# EAGLE board rt_soldering_pen (EAGLE 6.6.0)
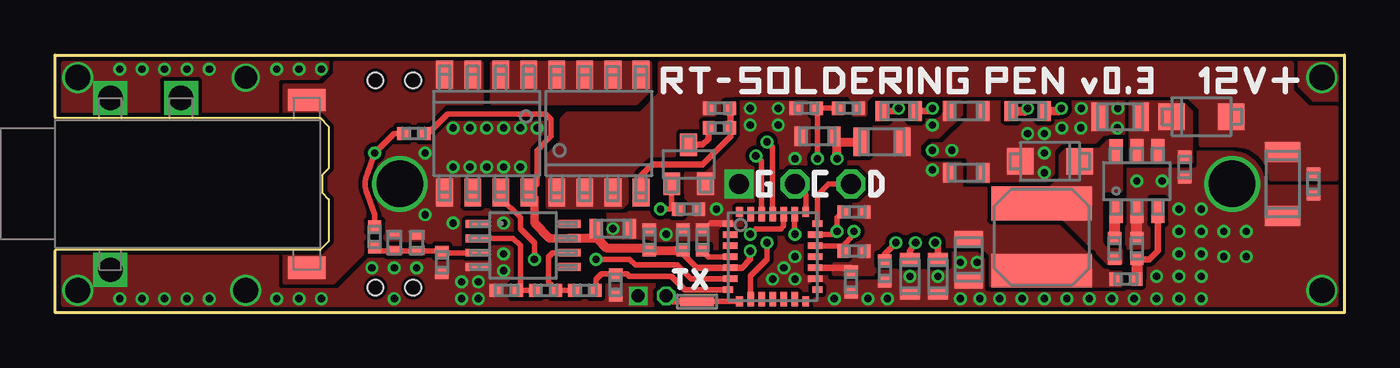
[diagram p0: board, top side]
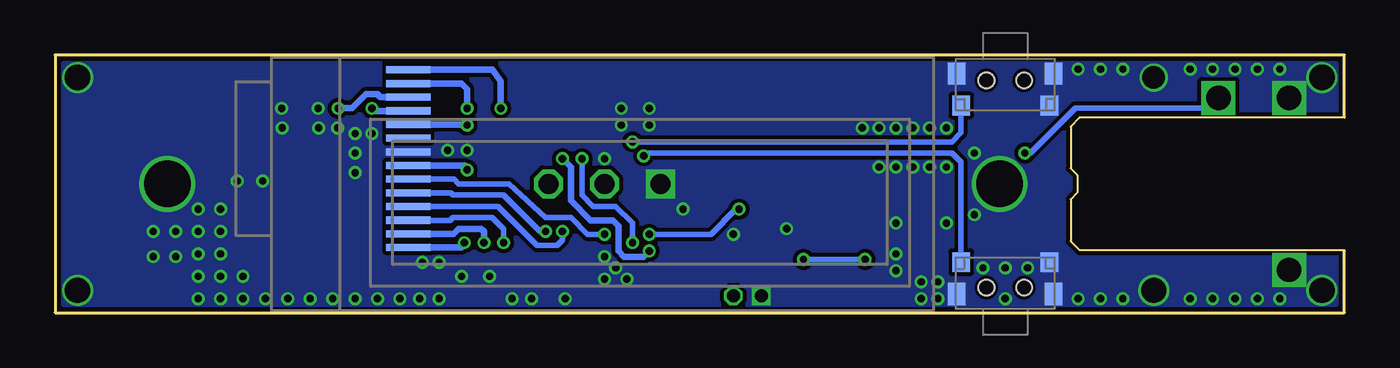
[diagram p1: board, bottom side, seen from below]

Size 58.42 x 11.68 mm. Coordinates in mm from the lower left corner, seen from the top.
Outline: 0,8.89 0,11.68 58.42,11.68 58.42,0 0,0 0,2.79
Copper layers (1*16): Top 0.0356mm / dielectric 1.5011mm / Bottom 0.0356mm
Design rules "oshpark-2layer *": minimum track width 6mil, minimum drill 13mil, track to track 6mil, track to pad 6mil, pad to pad 6mil, via to via 6mil, smd to smd 6mil, copper to edge 4mil, drill to drill 10mil, minimum pad ring 8mil, minimum via ring 5mil, stop-mask expansion 2mil, vias tented up to drill 13mil, thermal gap 10mil

## Footprints (pad centres in the part's own frame; a part is rotated, then mirrored left to right if it is on the bottom)
1206 = smd 0.9 x 1.6: 1 -1.45,0; 2 1.45,0
0402 = smd 0.5 x 0.6: 1 -0.5,0; 2 0.5,0
0805 = smd 0.7 x 1.3: 1 -0.95,0; 2 0.95,0
0603 = smd 0.6 x 0.9: 1 -0.75,0; 2 0.75,0
SOD123F = smd 1.2 x 1.2: A 1.35,0; C -1.35,0
DFN1006 = smd 0.4 x 0.7: A 0.35,0; C -0.35,0
SJ-3501-SMT = drill 1.1 pad 1.2 square: 1 2.5,-3.9; 3 5.7,3.9; 5 2.5,3.9 | smd 1.7 x 1: 2 11.4,3.8; 4 11.4,-3.8
1717 = smd 1.524 x 4.572: 1 -1.524,0; 2 1.524,0
OLED_I2C_091 = smd 2 x 0.32: 1 0,-4.03; 2 0,-3.41; 3 0,-2.79; 4 0,-2.17; 5 0,-1.55; 6 0,-0.93; 7 0,-0.31; 8 0,0.31; 9 0,0.93; 10 0,1.55; 11 0,2.17; 12 0,2.79; 13 0,3.41; 14 0,4.03
TST2435 = smd 0.8 x 0.9: 1 -2,-1.15; 2 2,-1.15 | smd 0.8 x 1: EP1 -2.2,0.3; EP2 2.2,0.3 | hole 0.7: -0.85,0; 0.85,0
PIN1X3 = drill 0.9 square: 1 -2.54,0 | drill 0.9 octagon: 2 0,0; 3 2.54,0
SOIC8 = smd 0.762 x 1.27: 1 -1.905,-2.667; 2 -0.635,-2.667; 3 0.635,-2.667; 4 1.905,-2.667; 5 1.905,2.667; 6 0.635,2.667; 7 -0.635,2.667; 8 -1.905,2.667
SOT23 = smd 0.762 x 1.016: 1 -0.762,-0.889; 2 0.762,-0.889; 3 0,0.889
SMD_15_60 = smd 1.524 x 0.381: TP 0,0
SOT23-6 = smd 0.6 x 1.1: 1 -0.95,-1.35; 2 0,-1.35; 3 0.95,-1.35; 4 0.95,1.35; 5 0,1.35; 6 -0.95,1.35
UFQFPN28 = smd 0.45 x 0.3: 1 -2.025,1.5; 7 -2.025,-1.5; 15 2.025,-1.5; 21 2.025,1.5 | smd 0.65 x 0.3: 2 -1.925,1; 3 -1.925,0.5; 4 -1.925,0; 5 -1.925,-0.5; 6 -1.925,-1; 16 1.925,-1; 17 1.925,-0.5; 18 1.925,0; 19 1.925,0.5; 20 1.925,1 | smd 0.3 x 0.45: 8 -1.5,-2.025; 14 1.5,-2.025; 22 1.5,2.025; 28 -1.5,2.025 | smd 0.3 x 0.65: 9 -1,-1.925; 10 -0.5,-1.925; 11 0,-1.925; 12 0.5,-1.925; 13 1,-1.925; 23 1,1.925; 24 0.5,1.925; 25 0,1.925; 26 -0.5,1.925; 27 -1,1.925
MSOP8 = smd 0.35 x 1: 1 -0.975,-2.1; 2 -0.325,-2.1; 3 0.325,-2.1; 4 0.975,-2.1; 5 0.975,2.1; 6 0.325,2.1; 7 -0.325,2.1; 8 -0.975,2.1

## Placement (x,y rotation side)
C1  22uF  [1206]  55.63,5.84 90 top
C2  100n  [0402]  57.02,5.84 90 top
C3  2.2uF/25V  [0805]  48.26,8.89 0 top
C4  100n  [0402]  51.18,6.6 90 top
C5  150n (220n)  [0402]  48.01,2.92 270 top
C6  22uF  [0805]  41.4,2.41 90 top
C7  100n  [0402]  36.07,1.4 90 top
C8  1uF  [0603]  34.54,8 0 top
C9  100n  [0402]  28.45,3.3 270 top
C10  10n  [0402]  29.34,3.3 270 top
C11  100n  [0402]  26.92,3.3 270 top
C12  2.2n  [0603]  25.27,3.81 180 top
C13  1n  [0402]  17.53,2.29 90 top
C14  1n  [0402]  25.4,1.27 90 top
C15  1uF  [0603]  41.27,9.14 0 top
C16  1uF  [0603]  41.27,6.35 0 top
C17  1uF  [0603]  44.07,9.14 180 top
C18  1uF  [0603]  38.23,9.14 0 top
C19  2.2uF/16V  [0603]  40.01,1.65 90 top
C20  2.2uF/16V  [0603]  38.73,1.65 90 top
D1  PMEG6010CEH  [SOD123F]  51.94,8.89 0 top
D2  PMEG6010CEH  [SOD123F]  45.09,6.86 180 top
D3  SBR02U100LP  [DFN1006]  16.38,3.17 90 top
D4  SBR02U100LP  [DFN1006]  15.37,3.17 270 top
JACK  SJ-3501-SMT  [SJ-3501-SMT]  0,5.84 0 top
L1  68uH  [1717]  44.7,3.43 270 top
L2  2.2uH  [0805]  37.47,7.75 180 top
OLED1  OLED_I2C_091  [OLED_I2C_091]  42.42,6.98 180 bottom
R1  3k3 (2k7)  [0402]  48.51,1.52 180 top
R2  1k (820R)  [0402]  49.02,2.92 270 top
R3  68k*  [0402]  35.94,9.27 0 top
R4  10k*  [0402]  34.04,9.27 0 top
R5  1M  [0402]  16.26,8.13 0 top
R6  5k6  [0402]  14.48,3.43 270 top
R7  100k(82k)  [0402]  22.23,1.02 0 top
R8  270R(220R)  [0402]  20.45,1.02 0 top
R9  5k6  [0402]  24,1.02 0 top
R10  10k  [0402]  28.7,4.7 0 top
R11  4k7  [0402]  30.1,8.38 0 top
R12  4k7  [0402]  30.1,9.27 0 top
R13  10k  [0402]  36.2,4.57 0 top
R14  10k  [0402]  36.2,2.79 0 top
R15  390k  [0402]  37.59,1.9 90 top
RT  RT-1  [RT-1]  -2.54,5.84 0 top
SW1  TST2435  [TST2435]  15.37,10.54 0 bottom
SW2  TST2435  [TST2435]  15.37,1.14 180 bottom
SWD  PINHEAD1X3X  [PIN1X3]  33.53,5.84 0 top
T1  TPC8120  [SOIC8]  24.64,8.13 0 top
T2  BSS816-SOT323  [SOT23]  28.7,6.73 0 top
TP1  TEST_PAD15X60  [SMD_15_60]  29.08,0.51 0 top
U1  LMR14203  [SOT23-6]  49.02,5.97 0 top
U2  STM32F031GX  [UFQFPN28]  32.51,2.54 0 top
U3  AD8551RM  [MSOP8]  21.21,3.05 270 top
U4  ACS711  [SOIC8]  19.56,8.13 180 top

## Library data of the parts
C1-C20 L1 L2 R1-R15 = rlc
D1-D4 = diode
JACK = jack
OLED1 = oled
RT = weller_rt
SW1 SW2 = buttons
SWD = pinhead
T1 T2 = mosfet
TP1 = test_point
U1 = ti
U2 = stm32
U3 = analog_devices
U4 = allegro

## Nets
3V3: C6.2 C7.2 C15.1 C16.1 L1.2 L2.1 OLED1.5 OLED1.8 R1.2 R13.2 R14.2 U2.17
12V: C1.2 C2.2 D1.A R3.2 R12.1 T1.1 T1.2 T1.3
12V_DC: C3.2 C4.2 D1.C U1.4 U1.5
BTN1: SW1.1 U2.25
BTN2: SW2.2 U2.26
C1N: C17.2 OLED1.4
C1P: C17.1 OLED1.3
C2N: C18.2 OLED1.2
C2P: C18.1 OLED1.1
CURRENT_SENS: U2.6 U4.7
DEBUG_OUT: TP1.TP U2.8
GND: C1.1 C2.1 C3.1 C4.1 C6.1 C7.1 C8.1 C9.1 C10.1 C11.1 C12.1 C13.1 C14.1 C15.2 C16.2 C19.1 C20.1 D2.A D3.A D4.C JACK.1 JACK.5 OLED1.7 R2.1 R4.1 R8.1 R10.2 R15.1 SW1.2 SW1.EP1 SW1.EP2 SW2.1 SW2.EP1 SW2.EP2 SWD.1 T2.2 U1.2 U2.1 U2.16 U3.4 U4.5
HEATER: JACK.2 JACK.4 U4.3 U4.4
HEATER_CONTROL: R10.1 T2.1 U2.24
HEATER_PWR: T1.5 T1.6 T1.7 T1.8 U4.1 U4.2
IREF: OLED1.12 R15.2
NRST: C10.2 U2.4
OLED_NRES: OLED1.9 U2.23
POWER_SWITCH: R11.2 R12.2 T1.4
POWER_SWITCH_LOW: R11.1 T2.3
SCL: OLED1.10 R14.1 U2.19
SDA: OLED1.11 R13.1 U2.20
SENSOR: JACK.3 R5.1 R6.1
SENSOR_FEEDBACK: R7.1 R8.2 U3.2
SENSOR_IN: C13.2 D3.C D4.A R6.2 U3.3
SENSOR_OUT: R7.2 R9.1 U3.6
SUPPLY_CB: C5.1 U1.1
SUPPLY_FB: R1.1 R2.2 U1.3
SUPPLY_SENS: R3.1 R4.2 U2.9
SWDCLK: SWD.2 U2.22
SWDIO: SWD.3 U2.21
SWOUT: C5.2 D2.C L1.1 U1.6
TEMP_SENS: C14.2 R9.2 U2.7
VCC: C19.2 OLED1.14
VCOM: C20.2 OLED1.13
VDDA: C8.2 C9.2 C11.2 C12.2 L2.2 R5.2 U2.5 U3.7 U4.8

## Tracks (layer width: path | path; a pad name or v marks a point on that pad's centre or on a via)
3V3  (via drill 0.33)
  Top 0.254: 36.07,2.04 C7.2
  Top 0.305: U2.17 36.07,2.04
  Bottom 0.305: OLED1.5 39.88,8.54 v39.75,8.51 | OLED1.8 39.88,6.67 v39.75,6.48
  pour Top (isolate 0.178, rank 3, no thermals): 37.08,1.78 37.08,2.67 37.47,3.05 42.04,3.05 42.42,2.67 42.42,1.27 48.26,1.27 48.26,1.78 47.75,1.78 45.59,3.94 42.55,3.94 42.29,4.19 42.29,5.59 41.02,5.59 41.02,6.73 39.5,6.73 39.12,7.11 39.12,7.62 39.5,8 40.01,8 41.02,9.02 41.02,9.52 35.94,9.52 35.94,2.16 35.31,2.16 35.31,1.78
12V
  pour Top (isolate 0.178, rank 2, no thermals): 55.12,6.1 arc90 53.34,7.62 51.94,7.62 51.94,9.27 51.31,9.91 36.96,9.91 36.7,9.65 36.7,9.02 36.2,9.02 36.2,9.65 35.94,9.91 30.73,9.91 25.65,4.83 22.35,4.83 22.35,7.11 22.99,7.75 22.99,8.76 23.24,9.02 26.54,9.02 27.43,9.91 27.43,11.3 56.01,11.3 56.01,10.03 56.77,9.27 58.04,9.27 58.04,6.1
12V_DC
  pour Top (isolate 0.178, rank 3, no thermals): 51.44,9.52 51.44,6.86 48.77,6.86 48.77,9.52
BTN1  (via drill 0.33)
  Top 0.254: U2.25 32.51,7.49 v32.26,7.75
  Bottom 0.254: v32.26,7.75 17.78,7.75 17.37,8.16 SW1.1
BTN2  (via drill 0.33)
  Top 0.254: U2.26 32.01,6.85 v31.75,7.11
  Bottom 0.254: SW2.2 17.37,3.56 17.37,6.83 17.78,7.24 31.62,7.24 v31.75,7.11
C1N  (via drill 0.33)
  Top 0.406: C17.2 43.94,9.14 v44.07,9.27
  Bottom 0.305: OLED1.4 43.95,9.15 v44.07,9.27
C1P  (via drill 0.33)
  Top 0.381: C17.1 45.47,9.14 v45.59,9.27
  Bottom 0.305: OLED1.3 43.68,9.77 43.81,9.91 44.32,9.91 44.96,9.27 v45.59,9.27
C2N  (via drill 0.33)
  Top 0.305: v39.75,9.27 39.62,9.14 C18.2
  Bottom 0.305: v39.75,9.27 39.75,10.14 40.01,10.39 OLED1.2
C2P  (via drill 0.33)
  Top 0.305: v38.23,9.27 38.1,9.14 C18.1
  Bottom 0.305: v38.23,9.27 38.23,10.51 38.61,11.02 OLED1.1
CURRENT_SENS  (via drill 0.33)
  Top 0.254: U4.7 20.19,5.21 21.08,4.32 21.08,3.81 21.72,3.17 v21.72,2.41 | v24.51,2.41 26.04,2.41 26.29,2.16 28.19,2.16 28.81,1.54 U2.6
  Bottom 0.254: v21.72,2.41 v24.51,2.41
DEBUG_OUT  (via drill 0.58)
  Top 0.254: U2.8 TP1.TP
  Top 0.305: TP1.TP 27.94,0.51 v27.69,0.76
GND  (via drill 0.33, 0.58, 1.02, 1.14, 2.11)
  Top 0.305: U2.1 29.72,4.04
  Top 0.508: R2.1 U1.2
  other vias: 18.03,8.38 20.32,1.9 19.56,8.38 2.92,11.05 3.94,0.63 44.83,7.24 48.16,9.27 49.02,5.97 50.16,5.97 50.93,1.65 5.97,0.63 50.93,0.63 49.91,0.63 40.64,7.37 48.9,0.63 48.13,8.38 53.98,3.68 26.42,0.76 36.83,0.63 47.88,0.63 27.69,3.56 29.97,4.7 35.31,0.63 39.75,7.37 31.5,9.27 41.91,0.63 41.02,0.63 4.95,0.63 50.93,2.67 50.93,3.68 44.83,6.35 44.83,8.13 50.93,4.7 20.32,2.67 18.8,8.38 32.77,8.51 51.94,0.63 51.94,1.65 51.94,2.67 49.91,1.65 6.99,0.63 19.18,0.63 46.48,8.38 33.53,6.98 45.62,8.38 51.94,3.68 33.53,1.52 25.27,3.81 1.02,10.67 2.92,0.63 20.32,8.38 3.94,11.05 53.34,5.84 15.62,5.84 52.96,2.54 53.98,2.54 52.96,3.68 33.53,2.54 32.51,1.52 32.77,9.27 21.08,6.6 18.03,6.6 18.8,6.6 19.56,6.6 20.32,6.6 21.08,8.38 21.84,8.38 4.95,11.05 5.97,11.05 18.41,0.63 6.99,11.05 51.94,4.7 20.32,4.06 14.35,2.03 15.37,2.03 16.38,2.03 15.37,0.63 18.41,1.4 19.18,1.4 18.03,4.06 46.86,0.63 45.85,0.63 44.83,0.63 43.81,0.63 42.8,0.63 37.72,0.63 10.03,11.05 10.03,0.63 11.05,11.05 12.06,11.05 11.05,0.63 12.06,0.63 33.02,2.03 16.76,7.24 16.76,4.44 44.07,8.13 46.51,9.27 41.02,2.29 41.78,2.29 40.01,1.65 38.73,1.65 1.02,1.02 8.64,10.67 8.64,1.02 57.4,1.02 57.4,10.67 31.5,8.51
  pour Bottom (isolate 0.178, no thermals): 0.38,11.3 0.38,0.38 58.04,0.38 58.04,11.3
  pour Top (isolate 0.178, rank 5, no thermals): 0.38,11.3 0.38,0.38 58.04,0.38 58.04,11.3
HEATER
  pour Top (isolate 0.178, rank 2, no thermals): 10.41,1.4 10.41,10.29 12.19,10.29 12.7,10.79 12.7,11.3 19.3,11.3 19.3,9.52 17.65,9.52 16.64,8.51 15.11,8.51 13.97,7.37 13.97,2.79 12.57,1.4
HEATER_CONTROL  (via drill 0.33)
  Top 0.254: U2.24 33.01,3.93 32.89,3.81 31.75,3.81 v31.5,3.56 | v27.43,4.7 27.94,4.7 | 27.94,4.7 T2.1 | 27.94,4.7 R10.1
  Bottom 0.254: v31.5,3.56 28.7,3.56 27.56,4.7 v27.43,4.7
HEATER_PWR
  pour Top (isolate 0.178, no thermals): 19.81,11.3 26.92,11.3 26.92,10.16 26.29,9.52 19.81,9.52
IREF  (via drill 0.33)
  Top 0.305: v38.1,3.17 37.59,2.67 R15.2
  Bottom 0.254: v38.1,3.17 38.1,3.81 38.61,4.32 40.39,4.32 40.51,4.19 OLED1.12
NRST
  Top 0.254: C10.2 29.6,2.54 U2.4
OLED_NRES  (via drill 0.33)
  Top 0.254: v33.53,3.56 33.51,3.57 U2.23
  Bottom 0.254: v33.53,3.56 34.29,3.56 35.05,4.32 36.2,4.32 37.85,5.84 40.13,5.84 40.34,6.05 OLED1.9
POWER_SWITCH
  Top 0.305: T1.4 26.54,6.22 27.05,6.73 29.34,6.73 30.6,7.99 R11.2 R12.2
POWER_SWITCH_LOW
  Top 0.305: R11.1 29.6,7.88 29.34,7.62 T2.3
SCL  (via drill 0.33)
  Top 0.254: 35.7,3.04 36.2,3.54 v36.2,3.68 | U2.19 35.7,3.04 | 35.7,3.04 R14.1
  Bottom 0.254: v36.2,3.68 36.45,3.68 38.1,5.33 40.39,5.33 40.49,5.43 OLED1.10
SDA  (via drill 0.33)
  Top 0.254: U2.20 35.28,3.54 v35.43,3.68 35.43,4.31 R13.1
  Bottom 0.254: v35.43,3.68 35.43,3.3 35.69,3.05 36.58,3.05 38.35,4.83 40.64,4.83 40.76,4.81 OLED1.11
SENSOR  (via drill 0.33)
  Top 0.254: R5.1 15.37,8.13 v14.48,7.24 14.13,6.28 arc40 14.13,5.41 14.48,4.44 R6.1
  Bottom 0.254: JACK.3 6.17,9.27 12.19,9.27 14.22,7.24 v14.48,7.24
SENSOR_FEEDBACK
  Top 0.254: R7.1 R8.2 21.07,1.15 21.08,1.27 21.08,3.05 20.76,3.37 U3.2
SENSOR_IN
  Top 0.254: R6.2 14.35,2.79 15.37,2.79 | D4.A 15.37,2.79 | 15.37,2.79 16.38,2.79 | D3.C 16.38,2.79 | 16.38,2.79 17.53,2.79 C13.2 17.53,2.72 U3.3
SENSOR_OUT
  Top 0.254: R9.1 R7.2 22.73,1.02 22.35,1.4 22.35,2.54 22.54,2.72 U3.6
SUPPLY_CB
  Top 0.508: U1.1 48.01,4.62 C5.1
SUPPLY_FB
  Top 0.305: R2.2 49.59,2.42 49.97,2.8 U1.3
  Top 0.508: R2.2 49.02,1.65 R1.1
SUPPLY_SENS  (via drill 0.33)
  Top 0.254: v32.26,3.17 32.26,2.41 31.51,1.67 U2.9 | v34.54,6.98 R4.2 | R4.2 R3.1 | R4.2
  Bottom 0.254: v34.54,6.98 34.54,5.33 34.04,4.83 33.02,4.83 32.26,4.06 v32.26,3.17
SWDCLK
  Top 0.254: U2.22 34.01,5.33 SWD.2
SWDIO
  Top 0.254: U2.21 34.54,5.33 35.05,5.84 SWD.3
SWOUT
  pour Top (isolate 0.178, rank 2, no thermals): 47.75,7.75 48.26,7.75 48.26,5.59 47.37,5.59 47.37,3.17 47.75,2.79 48.26,2.79 48.26,2.29 47.75,2.29 45.72,4.32 42.67,4.32 42.67,5.59 45.09,5.59 45.59,6.1 45.59,7.11 45.85,7.37 47.37,7.37
TEMP_SENS
  Top 0.254: R9.2 24.5,1.52 24.76,1.77 C14.2 25.92,1.77 26.04,1.65 27.94,1.65 28.55,1.04 U2.7
VCC  (via drill 0.33)
  Top 0.305: v39.88,3.17 40.01,3.05 C19.2
  Bottom 0.305: OLED1.14 40.01,2.95 v39.88,3.17
VCOM  (via drill 0.33)
  Top 0.305: C20.2 38.73,2.79 v38.99,3.17
  Bottom 0.305: OLED1.13 40.37,3.57 40.13,3.81 39.12,3.81 38.99,3.68 v38.99,3.17
VDDA  (via drill 0.33)
  Top 0.254: U4.8 21.84,5.84 21.84,7.37 22.48,8 22.48,8.76 22.23,9.02 17.78,9.02 16.89,8.13 R5.2
  Top 0.305: C8.2 35.43,7.75 | v31.5,2.79 31.5,2.41 31.12,2.04 U2.5 29.07,2.04 28.45,2.67 C9.2
  Top 0.381: U3.7 22.41,3.37 21.72,4.06 21.72,5.21 U4.8
  Top 0.406: v35.43,6.98 35.43,7.75 L2.2 | C9.2 C11.2 26.8,2.92 25.02,2.92 24.57,3.37 | 24.57,3.37 U3.7 | C12.2 24.57,3.37
  Bottom 0.305: v31.5,2.79 31.75,2.54 32.64,2.54 32.89,2.79 32.89,3.94 33.15,4.19 34.16,4.19 35.05,5.08 35.05,6.6 v35.43,6.98